# Altium PCB 9-10-00203-3_REV02_062018.PcbDoc
Units mm, origin at the board's own origin, x right, y up, seen from the top; angles counter-clockwise.
Board outline 6.7 x 3.1 mm, 4 copper layers (Layer 1 (Top), Layer 2, Layer 3, Layer 4 (bottom)), stack 0.2 mm thick; 29 components, 23 nets, 104 pads, 28 vias.
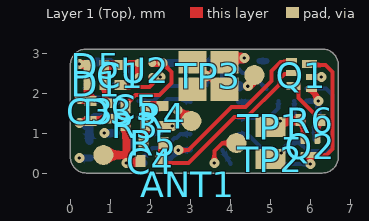
[diagram p0: Layer 1 (Top) view]
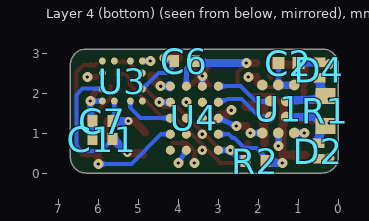
[diagram p1: Layer 4 (bottom) view, seen from below]
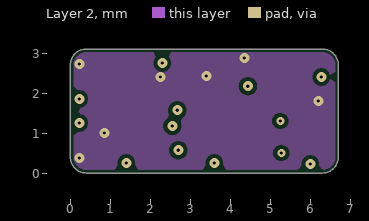
[diagram p2: Layer 2]
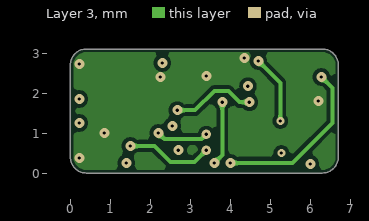
[diagram p3: Layer 3]

## Layer stack, top to bottom
Top Solder: solder mask 0.02, Solder Resist, Dk 0
Layer 1 (Top): signal copper 0.033
Polyimide + Adhesive: dielectric 0.0375, Dk 3.4
Layer 2: signal copper 0.017
Polyimide: dielectric 0.025, Dk 3.4
Layer 3: signal copper 0.017
Polyimide +Adhesive: dielectric 0.0375, Dk 3.4
Layer 4 (bottom): signal copper 0.033
Bottom Solder: solder mask 0.02, Solder Resist, Dk 0

## Board outline
0,0.4 0,2.7 cw(c0.4,2.7) 0.4,3.1 6.3,3.1 cw(c6.3,2.7) 6.7,2.7 6.7,0.4 cw(c6.3,0.4) 6.3,0 0.4,0 cw(c0.4,0.4)

## Design rules (kind name [scope] priority, off if disabled: settings)
AssemblyTestpoint [All] p1 off: testpointundercomponent=TRUE minsize=1.016 maxsize=2.54 preferedsize=1.524 minholesize=0 maxholesize=1.016 preferedholesize=0.813 testpointgrid=0.025 usegrid=TRUE gridtolerance=0 allowsidetop=TRUE allowsidebottom=TRUE
BoardOutlineClearance [All] p1: gap=0.075 ignorepadtopadclearanceinfootprint=FALSE
Clearance [All] p1: gap=0.1 ignorepadtopadclearanceinfootprint=FALSE except(0: Arc-Hole Track-Hole SMDPad-Hole THPad-Hole Via-Hole Fill-Hole Poly-Hole Region-Hole Text-Hole) // Sunstone Circuits Minimum Clearance Rule (Double Sided)
ComponentClearance [All] p1: gap=0 collisioncheckmode=3 verticalgap=0.01 showdistances=FALSE
DiffPairsRouting [All] p1 off: maxlimit=0.254 minlimit=0.254 mostfreqgap=0.254 toplayer_minwidth=0.381 toplayer_maxwidth=0.381 toplayer_prefwidth=0.381 midlayer1_minwidth=0.381 midlayer1_maxwidth=0.381 midlayer1_prefwidth=0.381 midlayer2_minwidth=0.381 midlayer2_maxwidth=0.381 midlayer2_prefwidth=0.381 bottomlayer_minwidth=0.381 bottomlayer_maxwidth=0.381 bottomlayer_prefwidth=0.381 maxuncoupledlength=12.7
FabricationTestpoint [All] p1 off: side=3 testpointundercomponent=TRUE minsize=1.016 maxsize=2.54 preferedsize=1.524 minholesize=0 maxholesize=1.016 preferedholesize=0.813 testpointgrid=0.025 allowsidetop=TRUE allowsidebottom=TRUE usegrid=TRUE gridtolerance=0
HoleSize "HoleSize~Sunstone Circuits" [All] p1: absolutevalues=TRUE maxlimit=2.54 minlimit=0.025 maxpercent=80.000 minpercent=20.000 // SSC Hole Size Rule For Single Sided & Double Sided Designs.
HoleSize Testpoint [All] p2: absolutevalues=TRUE maxlimit=2.54 minlimit=0.025 maxpercent=80.000 minpercent=20.000
HoleSize TestPointUsage [All] p3: absolutevalues=TRUE maxlimit=2.54 minlimit=0.025 maxpercent=80.000 minpercent=20.000
HoleToHoleClearance [All] p1: gap=0.2 allowstackedmicrovias=TRUE
MinimumAnnularRing "MinimumAnnularRing~Sunstone Circuits" [All] p1 off: minimumring=0.125 // Sunstone Circuits Minimum Annular Ring (Double Sided)
MinimumSolderMaskSliver [All] p1: minsoldermaskwidth=0.049
PlaneClearance "PlaneClearance~Sunstone Circuits" [All] p1: clearance=0.1 // Sunstone Circuits Power Plane Clearance Rule (Double Sided)
PlaneConnect "PlaneConnect~Sunstone Circuits" [All] p1: planeconnectstyle=Relief reliefexpansion=0.254 reliefentries=4 reliefconductorwidth=0.203 reliefairgap=0.254 // Sunstone Circuits Power Plane Connect Rule (Double Sided)
PolygonConnect [All vs IsNamedPolygon('Layer 1 (Top)-No Net')] p1: connectstyle=Relief reliefconductorwidth=0.254 reliefentries=4 polygonreliefangle="90 Angle" airgapwidth=0.254
PolygonConnect "PolygonConnect~Sunstone Circuits" [All] p2: connectstyle=Direct reliefconductorwidth=0.203 reliefentries=4 polygonreliefangle="90 Angle" airgapwidth=0.254 // Sunstone Circuits Polygon Connect Style (Double Sided)
RoutingVias "RoutingVias~Sunstone Circuits" [All] p1 off: holewidth=0.254 width=0.635 viastyle="Through Hole" minholewidth=0.152 minwidth=0.381 maxholewidth=0.635 maxwidth=1.016 // Sunstone Circuits Routing Vias Rule (Double Sided)
ShortCircuit "ShortCircuit~Sunstone Circuits" [All] p1: allowed=FALSE // Sunstone Circuits Short Circuit Rule~Do Not Allow (Double Sided)
SilkToSilkClearance [All] p1: silktosilkclearance=0.1
SilkToSolderMaskClearance SilkscreenOverComponentPads [IsPad] p1: minsilkscreentomaskgap=0.064 clearancetoexposedcopper=TRUE
SolderMaskExpansion "SolderMaskExpansion~Sunstone Circuits" [All] p1: expansion=0.07 // Sunstone Circuits Solder Mask Expansion Rule (Double Sided)
ViasUnderSMD "ViasUnderSMD~Sunstone Circuits" [All] p1: allowed=TRUE // Sunstone Circuits Vias Under SMD~Do Not Allow (Double Sided)
Width "Width~Sunstone Circuits" [All] p1 off: maxlimit=2.54 minlimit=0.076 preferedwidth=0.254 toplayer_prefwidth=0.076 midlayer1_minwidth=0.152 midlayer2_minwidth=0.152 bottomlayer_prefwidth=0.102 minimp=50.000000 maximp=50.000000 favimp=50.000000 // Sunstone Circuits Minimum Width Rule (Double Sided)
18 further rules are at their usual default settings.

## Classes and differential pairs
component class ZPW_Z601Rx_Sheet2_030218: C4 C5 C6 C7 C8 C9 C10 C11 Q1 Q2 R2 R3 R4 R5 R6 TP1 TP2 TP3 U3 U4
component class ZPW_Z601Rx_Sheet1_030218: ANT1 C1 C2 C3 D1 D2 D3 D4 D5 R1 U1 U2

## Components (designator, comment, footprint, x,y, rotation, side; value= is the part's Value field where it differs from the comment)
ANT1 "=Value" "NFC ANTENNA MOUNT - SMALL" 2.941,-0.292 r270 top
C1 "2.2uF" CAPC0603X03L(0201)#1 1.25,2.45 r90 top
C2 "2.2uF" CAPC0603X03L(0201)#2 1.25,2.75 r0 bottom
C3 "220pF" CAPC0603X03L(0201)#1 0.5,1.55 r270 top
C4 "47nF" CAPC0603X03L(0201)#1 2,0.3 r180 top
C5 "470nF" CAPC0603X03L(0201)#1 1.625,1.65 r0 top
C6 "2.2uF" CAPC0603X03L(0201)#3 3.85,2.8 r180 bottom
C7 "2.2uF" CAPC0603X03L(0201)#1 5.9,1.3 r180 bottom
C11 "2.2uF" CAPC0603X03L(0201)#1 5.9,0.85 r180 bottom
D1 "497-15253-1-ND" BAT30F4 0.65,2.225 r180 top
D2 "497-15253-1-ND" BAT30F4 0.5,0.55 r270 bottom
D3 "497-15253-1-ND" BAT30F4 0.95,1.55 r270 top
D4 "497-15253-1-ND" BAT30F4 0.475,2.575 r90 bottom
D5 "GDZ4V7LP3-7DICT-ND" DFN35P61X30-2N 0.65,2.675 r180 top
Q1 "DMC21D1UDA" DMC21D1UDA 5.775,2.45 r90 top
Q2 "CSD23280F3" CSD23280F3 6,0.675 r270 top
R1 "5.1k" "RES1005X06L (0402 Imperial)" 0.325,1.55 r270 bottom
R2 "100" RES0603X03L(0201) 2.075,0.3 r0 bottom
R3 "69.8K" RES0603X03L(0201) 1.625,1.2 r180 top
R4 "24.3K" RES0603X03L(0201) 2.3,1.425 r270 top
R5 "243K" RES0603X03L(0201) 2.075,0.75 r180 top
R6 "220K" RES0603X03L(0201) 6,1.325 r0 top
TP1 "BAT+" "PAD 1.5MM X 0.5MM"#1 5.075,1.15 r0 top locked
TP2 "Vout" "PAD 1.5MM X 0.5MM"#2 5,0.35 r0 top locked
TP3 "BAT-" BAT- 3.45,2.43 r0 top locked
U1 "AS3953B-BTWM NFX Rx IC" 10-WLCSP 1.5,1.6 r90 bottom
U2 "2.5V LDO 450mA non-active" BGA4x2 1.875,2.575 r0 top locked
U3 "ZPA125CSP" BGA12C30P4X4_138X138X38 5.4,2.3 r90 bottom
U4 "MKL03Z32CAF4R" MKL03Z32CBF4R 3.6,1.37 r90 bottom value=Value

## Footprints (in the part's own frame and the unit in brackets; to place one, negate y for a bottom-side part, rotate by r counter-clockwise, add the part's x,y. Pads: shape width x height; smd on the part's side, far side on the other; paste and mask are expansions set on the pad)
10-WLCSP [mm] "AS3953A WLCSP"
  round 0.27 smd paste+0 mask+0.05: A1(-0.6,0.4) A2(-0.2,0.2) A3(0.2,0.2) A4(0.6,0.4) B1(-0.6,0) B2(-0.2,-0.2) B3(0.2,-0.2) B4(0.6,0) C1(-0.6,-0.4) C4(0.6,-0.4)
BAT30F4 [mm]
  rect 0.24x0.3 smd mask+0.05: 1(-0.195,0) 2(0.195,0)
  body extent -0.3,-0.15 0.3,0.15, height 0.3
BAT- [mm] "bat- placeholder"
  rect 0.7x0.57 smd paste-0.35 mask+0.05: 1(-0.4,0.337) 1(0.4,0.337)
  rect 0.7x0.58 smd paste-0.35 mask+0.05: 1(-0.4,-0.337) 1(0.4,-0.337)
  Layer 1 (Top) lines w0.125: -0.245,0.249 -0.021,0.024 0,0.003 ; -0.235,-0.232 -0.029,-0.026 0,0.003 ; 0.235,-0.231 0,0.003 ; 0.236,0.239 0,0.003
  body extent -0.75,-0.63 0.75,0.89, height 4.23
BGA4x2 [mm]
  round 0.2 smd mask+0.075: A1(-0.175,0.175) A2(0.175,0.175) B1(-0.175,-0.175) B2(0.175,-0.175)
  body extent -0.32,-0.32 0.32,0.32, height 0.4
BGA12C30P4X4_138X138X38 [mm] "BGA, 12-Leads, Body 1.4x1.4mm,  Pitch 0.30mm"
  round 0.175 smd mask+0.05: 1(-0.5,0.5) 2(-0.2,0.5) 3(0.2,0.5) 4(0.5,0.5) 5(0.5,0.2) 6(0.5,-0.2) 7(0.5,-0.5) 8(0.2,-0.5) 9(-0.2,-0.5) 10(-0.5,-0.5) 11(-0.5,-0.2) 12(-0.5,0.2)
  body extent -0.7,-0.69 0.69,0.7, height 0.36
CAPC0603X03L(0201)#1 [mm]
  rect 0.25x0.3 smd mask+0.05: 1(-0.25,0) 2(0.25,0)
  body extent -0.3,-0.15 0.3,0.15, height 0.33
CAPC0603X03L(0201)#2 [mm]
  rect 0.3x0.3 smd mask+0.05: 1(-0.25,0) 2(0.25,0)
  body extent -0.3,-0.15 0.3,0.15, height 0.33
CAPC0603X03L(0201)#3 [mm]
  rect 0.24x0.3 smd mask+0.075: 1(-0.25,0)
  rect 0.25x0.3 smd mask+0.075: 2(0.25,0)
  body extent -0.3,-0.15 0.3,0.15, height 0.33
CSD23280F3 [mm] "-12V P-CHANNEL FEMNTOFET"
  rrect50% 0.25x0.15 smd mask+0.05: 1(-0.175,0.175) 2(-0.175,-0.175)
  rrect50% 0.15x0.5 smd mask+0.05: 3(0.225,0)
  round 0.1 on Mech2: 5(-0.203,0.175)
  body extent -0.36,-0.32 0.37,0.32, height 0.35
DFN35P61X30-2N [mm] "DFN, 2-Leads, Body 0.31x0.61mm, Pitch 0.35mm, IPC Medium Density"
  rect 0.24x0.3 smd mask+0.05: 1(-0.195,0) 2(0.195,0)
  body extent -0.31,-0.16 0.31,0.16, height 0.3
DMC21D1UDA [mm] "-12V P-Channel FemntoFET MOSFET"
  rect 0.2x0.35 smd mask+0.075: D1(-0.275,0.2)
  rect 0.2x0.375 smd mask+0.075: D2(0.275,-0.2)
  rect 0.15x0.275 smd mask+0.075: G1(-0.05,-0.25) G2(0.05,0.243) S1(-0.35,-0.25) S2(0.35,0.243)
MKL03Z32CBF4R [mm] "MKl03 CSp package"
  round 0.23 smd mask+0.05: A1(-0.8,0.6) A2(-0.4,0.6) A3(0,0.6) A4(0.4,0.6) A5(0.8,0.6) B1(-0.8,0.2) B2(-0.4,0.2) B3(0,0.2) B4(0.4,0.2) B5(0.8,0.2) C1(-0.8,-0.2) C2(-0.4,-0.2) C3(0,-0.2) C4(0.4,-0.2) C5(0.8,-0.2) D1(-0.8,-0.6) D2(-0.4,-0.6) D3(0,-0.6) D4(0.4,-0.6) D5(0.8,-0.6)
  body extent -1,-0.8 1,0.8, height 0.34
"NFC ANTENNA MOUNT - SMALL" [mm] "Small NFC Antenna Mount"
"PAD 1.5MM X 0.5MM"#1 [mm]
  rect 0.75x0.5 smd paste-0.75 mask+0.075: 1(-0.075,0)
"PAD 1.5MM X 0.5MM"#2 [mm]
  rect 0.75x0.5 smd paste-0.75 mask+0.075: 1(0,0)
RES0603X03L(0201) [mm]
  rect 0.25x0.3 smd mask+0.05: 1(-0.25,0) 2(0.25,0)
  body extent -0.3,-0.15 0.3,0.15, height 0.33
"RES1005X06L (0402 Imperial)" [mm] "Chip Resistor 2-Leads, Body 1.00x0.50mm, IPC High Density"
  rect 0.4x0.5 smd mask+0.05: 1(-0.375,0) 2(0.375,0)
  body extent -0.52,-0.28 0.53,0.27, height 0.55

## Part data
ANT1: library part NFC_Antenna, "NFC Antenna"
C1 C2 C6 C7 C11: library part "Cap Semi", "CAP CER 2.2UF 6.3V X5R 0201", Manufacturer=Murata, Manufacturer Part Number=GRM033R60J225ME47D, Package=0201, Supplier1 Part Number=490-13225-2-ND, Tolerance=20%, Voltage Rating=6.3V, CM BOM=X, LatestRevisionDate=29-May-2009, LatestRevisionNote="IPC-7351 Footprint Added.", PackageDescription="Chip Capacitor, 0603", Published=8-Jun-2000, Publisher="Altium Limited", Supplier1=Digi-Key, Type=CAP
C3: library part Cap, "Capacitor", Manufacturer=Murata, Manufacturer Part Number=GRM0335C1H221JA01D, Operating Temperature="-55°C ~ 125°C", Package / Case="0201 (0603 Metric)", Ratings=-, Standard Package=15,000, Supplier Part Number 1=490-11316-2-ND, Temperature Coefficient="C0G, NP0", Tolerance=±5%, Voltage - Rated=50V, Applications="General Purpose", Capacitance=220pF, Catalog Drawings="GRM Series_0201", Category=Capacitors, ComponentLink1Description=http://components.arrow.com/part/dataview/0323_06471816, ComponentLink1URL=http://components.arrow.com/part/dataview/0323_06471816, ComponentLink2Description=http://search.murata.co.jp/Ceramy/image/img/A01X/partnumbering_e_01.pdf, ComponentLink2URL=http://search.murata.co.jp/Ceramy/image/img/A01X/partnumbering_e_01.pdf, ComponentLink3Description=http://psearch.murata.com/capacitor/product/GRM0335C1H390JA01%23.pdf, ComponentLink3URL=http://psearch.murata.com/capacitor/product/GRM0335C1H390JA01%23.pdf, ComponentLink4Description=http://psearch.en.murata.com/capacitor/product/GRM0335C1H390JA01%23.pdf, ComponentLink4URL=http://psearch.en.murata.com/capacitor/product/GRM0335C1H390JA01%23.pdf, Family="Ceramic Capacitors", Mounting Type="Surface Mount, MLCC", Packaging="Tape & Reel (TR)", Pricing 1="1=0.1, 10=0.01, 100=0.0037, 500=0.0027, 1000=0.0021, 2500=0.0019, 5000=0.0018 (USD)", Series=GRM, Size / Dimension="0.024\" L x 0.012\" W (0.60mm x 0.30mm)", Supplier 1=Digikey, Thickness (Max)="0.013\" (0.33mm)"
C4: library part "Cap Semi", "CAP CER 0.047UF 16V X5R 0201", Manufacturer Part Number=GRM033R61C473KE84D, Package=0201, Supplier1 Part Number=490-7227-2-ND, Tolerance=20%, Voltage Rating=16V, CM BOM=X, LatestRevisionDate=29-May-2009, LatestRevisionNote="IPC-7351 Footprint Added.", PackageDescription="Chip Capacitor", PackageReference=0201, Published=8-Jun-2000, Publisher="Altium Limited", Supplier1=DigiKey, Type=CAP
C5: library part "Cap Semi", "CAP CER 0.47UF 4V X5R 0201", Manufacturer Part Number=GRM033R60G474ME90D, Package=0201, Supplier1 Part Number=490-10405-2-ND, Tolerance=20%, Voltage Rating=4V, CM BOM=X, LatestRevisionDate=29-May-2009, LatestRevisionNote="IPC-7351 Footprint Added.", PackageDescription="Chip Capacitor", Published=8-Jun-2000, Publisher="Altium Limited", Supplier1=DigiKey, Type=CAP
D1 D2 D3 D4: library part BAT30F4, "DIODE SCHOTTKY", Capacitance @ Vr, F=-, Current - Average Rectified (Io)=300mA, Current - Reverse Leakage @ Vr="50µA @ 30V", Manufacturer=STMicroelectronics, Operating Temperature - Junction="-30°C ~ 85°C", Package / Case=2-XFDFN, Supplier Device Package=0201, Voltage - DC Reverse (Vr) (Max)=30V, Voltage - Forward (Vf) (Max) @ If="310mV @ 10mA", Category="Discrete Semiconductor Products", ComponentLink1Description=http://www.farnell.com/datasheets/1880978.pdf, ComponentLink1URL=http://www.farnell.com/datasheets/1880978.pdf, ComponentLink2Description=http://www.farnell.com/datasheets/1865111.pdf, ComponentLink2URL=http://www.farnell.com/datasheets/1865111.pdf, ComponentLink3Description=http://www.st.com/st-web-ui/st@ic/active/en/resource/technical/document/datasheet/DM00104747.pdf, ComponentLink3URL=http://www.st.com/st-web-ui/st@ic/active/en/resource/technical/document/datasheet/DM00104747.pdf, ComponentLink4Description=http://www.st.com/st-web-ui/static/active/en/resource/technical/document/datasheet/DM00104747.pdf, ComponentLink4URL=http://www.st.com/st-web-ui/static/active/en/resource/technical/document/datasheet/DM00104747.pdf, Diode Type=Schottky, Family="Diodes - Rectifiers - Single", Manufacturer Part Number=BAT30F4, Mounting Type="Surface Mount", Packaging="Tape &amp; Reel (TR)", Pricing 1="1=0.4, 10=0.326, 100=0.1726, 500=0.1136, 1000=0.0772 (USD)", Reverse Recovery Time (trr)=-, Series=-, Speed="Fast Recovery =  200mA (Io)", Stock 1=40093, Supplier 1=Digikey, Supplier Part Number 1=497-15253-1-ND
D5: library part GDZ4V7LP3-7, "DIODE ZENER 4.7V 250MW 2DFN", Current - Reverse Leakage @ Vr="2µA @ 1V", Manufacturer=Diodes, Operating Temperature="-55°C ~ 150°C (TA)", Package / Case=2-XFDFN, Power - Max=250mW, Supplier Device Package=2-X3-DFN0603, Tolerance=-, Voltage - Zener (Nom) (Vz)=4.7V, Category="Discrete Semiconductor Products", ComponentLink1Description=https://datasheet.ciiva.com/29597/gdzxvxlp3-29597945.pdf, ComponentLink1URL=https://datasheet.ciiva.com/29597/gdzxvxlp3-29597945.pdf, ComponentLink2Description=https://datasheet.ciiva.com/29597/gdzxvxlp3-29597946.pdf, ComponentLink2URL=https://datasheet.ciiva.com/29597/gdzxvxlp3-29597946.pdf, ComponentLink3Description=https://datasheet.ciiva.com/29597/gdzxvxlp3-29597947.pdf, ComponentLink3URL=https://datasheet.ciiva.com/29597/gdzxvxlp3-29597947.pdf, Family="Diodes - Zener - Single", Impedance (Max) (Zzt)=-, Manufacturer Part Number=GDZ4V7LP3-7, Mounting Type="Surface Mount", Packaging="Tape & Reel (TR)", Pricing 1="1=0.37, 10=0.304, 100=0.1615, 500=0.1062, 1000=0.0722 (USD)", Proven=False, Series="Automotive, AEC-Q101", Stock 1=5000, Supplier 1=Digikey, Supplier Part Number 1=GDZ4V7LP3-7DICT-ND, Voltage - Forward (Vf) (Max) @ If=-
Q1: "COMPLEMENTARY PAIR ENHANCEMENT MODE MOSFET", Manufacturer Part Number=DMC21D1UDA
Q2: library part DMP2160UW, "MOSFET P-CH -12V", CM BOM=X, Manufacturer Part Number=CSD23280F3, Supplier1=Digi-Key, Type=MOSFET
R1: library part Resistor, "RES SMD 5.1KOHM 0.25% 1/16W 0402", Manufacturer=Panasonic, Manufacturer Part Number=ERA-2ARC512X, Package / Case=0402, Power (Watts)="0.063W, 1/16W", Supplier1 Part Number=P5.1KCQCT-ND, Tolerance=±0.25%, Category=Resistors, Family="Chip Resistor - Surface Mount", Number of Terminations=2, Resistance (Ohms)=5.1k, Supplier1=Digikey, Supplier Device Package=0402
R2: library part Res3, "RES SMD 100 OHM 0.1% 1/20W 0201", Manufacturer Part Number=ERA-1AEB101C, Package=0201, Power Rating=1/20W, Supplier1 Part Number=P100BXTR-ND, Tolerance=0.1%, CM BOM=X, LatestRevisionDate=29-May-2009, LatestRevisionNote="IPC-7351 Footprint Added.", PackageDescription="Chip Resistor", Published=8-Jun-2000, Publisher="Altium Limited", Supplier1=Digi-Key, Type=RES
R3: library part Res3, "RES SMD 69.8K OHM 1% 1/20W 0201", Manufacturer Part Number=RC0201FR-0769K8L, Package=0201, Power Rating=1/10W, Supplier1 Part Number=YAG2776TR-ND, Tolerance=1%, CM BOM=X, LatestRevisionDate=29-May-2009, LatestRevisionNote="IPC-7351 Footprint Added.", PackageDescription="Chip Resistor", Published=8-Jun-2000, Publisher="Altium Limited", Supplier1=DigiKey, Type=RES
R4: library part Res3, "RES SMD 24.3K OHM 1% 1/20W 0201", Manufacturer Part Number=ERJ-1GEF2432C, Package=0201, Power Rating=1/20W, Supplier1 Part Number=P24.3KABTR-ND, Tolerance=1%, CM BOM=X, LatestRevisionDate=29-May-2009, LatestRevisionNote="IPC-7351 Footprint Added.", PackageDescription="Chip Resistor", Published=8-Jun-2000, Publisher="Altium Limited", Supplier1=DigiKey, Type=RES
R5: library part Res3, "RES SMD 243K OHM 1% 1/20W 0201", Manufacturer Part Number=RMCF0201FT243K, Package=0201, Power Rating=1/20W, Supplier1 Part Number=RMCF0201FT243KTR-ND, Tolerance=1%, CM BOM=X, LatestRevisionDate=29-May-2009, LatestRevisionNote="IPC-7351 Footprint Added.", PackageDescription="Chip Resistor", Published=8-Jun-2000, Publisher="Altium Limited", Supplier1=DigiKey, Type=RES
R6: library part Res3, "RES SMD 220K OHM 1% 1/20W 0201", Manufacturer Part Number=RC0201FR-07220KL, Package=0201, Power Rating=1/20W, Supplier1 Part Number=YAG2277CT-ND, Tolerance=1%, CM BOM=X, LatestRevisionDate=29-May-2009, LatestRevisionNote="IPC-7351 Footprint Added.", PackageDescription="Chip Resistor", Published=8-Jun-2000, Publisher="Altium Limited", Supplier1=DigiKey, Type=RES
TP2 TP3: library part BAT+, "BAT+"
U1: library part AS3953A_WLCSP, "IC NFC INTERFACE 14443A LEVEL4", Frequency="13.56 MHz", Manufacturer="austriamicrosystems (ams)", Manufacturer Part Number=AS3953B-BTWM, Maximum Operating Temperature="+ 85 C", Minimum Operating Temperature="- 40 C", Operating Temperature Range="- 40 C to + 85 C", Package / Case=WLCSP-10, Supplier Part Number 1=AS3953B-BTWMCT-ND, Brand=ams, ComponentLink1Description=http://www.mouser.com/ds/2/588/AS3953A_Datasheet_EN_v1-253125.pdf, ComponentLink1URL=http://www.mouser.com/ds/2/588/AS3953A_Datasheet_EN_v1-253125.pdf, ComponentLink2Description=http://www.ams.com/eng/content/download/325044/1140864/78495, ComponentLink2URL=http://www.ams.com/eng/content/download/325044/1140864/78495, Factory Pack Quantity=12000, Function="Designed to create a fast data link between an ISO 14443A reader device (PCD) and a microcontroller", Memory Size="1 kbit", Mounting Style=SMD/SMT, Packaging=Reel, Pricing 1="12000=0.4121 (USD)", Product Category="RFID Transponders", RoHS=Details, Series=AS3953, Stock 1=0, Supplier 1=Digikey
U2: library part NCP161BFCT250T2G, "LDO Voltage Regulators CSP LDO 450MA NON-ACTIVE", Current - Limit (Min)=-, Current - Output=200mA, Manufacturer=OnSemi, Manufacturer Part Number=LDBL20D-25R, Operating Temperature="-40°C ~ 125°C", Package / Case=4-STSTAMP™, Supplier Part Number 1=NCP161BFCT250T2G-ND, Voltage - Input="Up to 5.5V", Voltage - Output=2.5V, Category="Integrated Circuits (ICs)", Family="PMIC - Voltage Regulators - Linear", Mounting Type="Surface Mount", Number of Regulators=1, Packaging="Tape & Reel (TR)", Regulator Topology="Positive Fixed", Series=-, Supplier 1=Digi-Key, Supplier Device Package=4-STSTAMP™, Voltage - Dropout (Typical)=-
U3: Supplier1 Part Number="ZPA125 R2", CM BOM=X, Supplier1=ZPower
U4: library part MKL03Z32CBF4R_1, "Kinetis Kl03: 48MHz Cortex-M0+ Ultra low power MCU", Manufacturer Part Number=MKL03Z32CBF4R, Supplier1 Part Number=MKL03Z32CBF4R-ND, CM BOM=X, Supplier1=Digi-Key, Vendor=FREESCALE

## Free pads (board coordinates)
  round 0.5 smd paste+0 mask+0.05: 4(0.825,0.45) 4(3.025,1.3) 4(4.15,0.75) 4(4.6,2.45)

## Via types
v1: diameter 0.25, hole 0.085, Layer 1 (Top) to Layer 4 (bottom), tented both sides, 15 vias
v2: diameter 0.25, hole 0.085, Layer 3 to Layer 4 (bottom), tented bottom, 5 vias
v3: diameter 0.2, hole 0.085, Layer 1 (Top) to Layer 4 (bottom), tented bottom, 2 vias
v4: diameter 0.23, hole 0.085, Layer 3 to Layer 4 (bottom), 2 vias
v5: diameter 0.25, hole 0.085, Layer 1 (Top) to Layer 4 (bottom), tented top, 2 vias
v6: diameter 0.25, hole 0.085, Layer 3 to Layer 4 (bottom), 1 vias
v7: diameter 0.25, hole 0.085, Layer 1 (Top) to Layer 4 (bottom), tented bottom, 1 vias

## Nets (pads, with @x,y where several pads share a name; then routed paths per layer and width w, separated by ;. In a path a pad name is that pad's centre, name@x,y a point inside that pad or via, vN(x,y) a via of type N, cw(c..) or ccw(c..) an arc to the next point about the centre after c; other vN are vias at no path point)
BAT+: C7.2 Q2.2 R6.1 TP1.1 U3.7 U3.12 | length 4.3
  Layer 1 (Top) w0.1: Q2.2@5.802,0.873 5.815,0.86 Q2.2
  Layer 1 (Top) w0.12: Q2.2@5.815,0.85 5.815,0.86 R6.1@5.815,1.325
  Layer 1 (Top) w0.2: TP1.1@4.828,1.017 TP1.1@5.104,1.293 ; TP1.1@5.1,1.3 v3(5.25,1.3) R6.1@5.75,1.3
  Layer 3 w0.1: v2(4.7,2.8) 5.25,2.25 v3(5.25,1.3)
  Layer 4 (bottom) w0.1: v2@4.702,2.815 v2@4.725,2.815 ; U3.12@5.593,1.807 U3.12 C7.2@5.6,1.35
  Layer 4 (bottom) w0.15: v2@4.725,2.8 U3.7
  Layer 4 (bottom) w0.2: v3(5.25,1.3) C7.2
GND: C1.1 C2.1 C6.1 C7.1 C11.1 D2.2 D4.2 D5.2 Q1.S1 TP3.1 U1.C1 U2.B2 U3.1 U3.9 U4.C5 | length 5.9
  Layer 1 (Top) w0.1: C1.1@1.25,2.15 1.975,2.15 2.05,2.225 U2.B2
  Layer 1 (Top) w0.15: Q1.S1@6.05,2.1 v1(6.2,1.8)
  Layer 1 (Top) w0.2: U2.B2 v1(2.25,2.4) ; TP3.1@4.012,2.876 TP3.1@4.013,2.875
  Layer 1 (Top) w0.22: v1@0.225,2.715 D5.2@0.425,2.715
  Layer 1 (Top) w0.25: TP3.1@4.013,2.875 v1(4.35,2.875)
  Layer 4 (bottom) w0.1: U4.C5@3.4,2.186 v7(3.4,2.425) ; C6.1@4.1,2.7 4.3,2.5 4.5,2.5 U3.9 ; C7.1@6.155,1.289 C7.1@6.168,1.302
  Layer 4 (bottom) w0.125: U3.1 v1(6.2,1.8)
  Layer 4 (bottom) w0.15: C7.1@6.2,1.281 v1(6.2,1.8)
  Layer 4 (bottom) w0.175: v1(0.225,0.375) D2.2@0.5,0.375
  Layer 4 (bottom) w0.2: D4.2@0.475,2.775 C2.1@1,2.775 ; v1(0.85,1) U1.C1 U1.C1@1.127,1 ; C6.1@4.1,2.85 v1@4.35,2.85 ; v1@4.351,2.872 v1(4.35,2.875) ; C11.1 C7.1@6.15,1.25
  other v1: 0.225,2.725
GPIO: Q1.G1 U4.B1 | length 4.9
  Layer 1 (Top) w0.1: Q1.G1@6.04,2.394 Q1.G1@6.046,2.4
  Layer 1 (Top) w0.15: Q1.G1@6.046,2.4 v1(6.275,2.4)
  Layer 3 w0.1: v2(4,0.25) 5.55,0.25 6.55,1.25 6.55,2.125 v1(6.275,2.4)
  Layer 4 (bottom) w0.1: U4.B1 v2(4,0.25) ; v2@3.994,0.246 v2@4.005,0.228
MISO: U1.A3 U4.D5 | length 1.5
  Layer 4 (bottom) w0.1: U1.A3 2.075,1.8 2.445,2.17 U4.D5
MOSI: U1.A2 U4.D4 | length 1.5
  Layer 4 (bottom) w0.1: U1.A2 1.975,1.4 2.425,1.85 2.75,1.85 U4.D4
NetC4_1: C4.1 Q1.G2 R5.1 | length 4.8
  Layer 1 (Top) w0.1: C4.1@2.25,0.25 2.95,0.25 4.1,1.4 4.41,1.4 5.225,2.215 5.225,2.35 5.35,2.475 5.536,2.475 Q1.G2@5.54,2.48 ; C4.1@2.25,0.256 C4.1@2.25,0.275 ; C4.1@2.266,0.215 C4.1@2.275,0.205
  Layer 1 (Top) w0.15: C4.1@2.275,0.3 R5.1@2.275,0.75
NetC5_2: C5.2 R3.1 R4.1 R5.2 | length 1.3
  Layer 1 (Top) w0.2: R5.2@1.85,0.75 R3.1@1.85,1.15
  Layer 1 (Top) w0.25: R3.1@1.875,1.221 C5.2 ; C5.2@1.875,1.675 R4.1
NetQ1_D1: Q1.D1 Q2.1 R6.2 | length 1.6
  Layer 1 (Top) w0.1: Q1.D1@5.7,2.175 5.7,1.875 R6.2@6.2,1.375 ; R6.2@6.191,1.4 6.202,1.4 R6.2@6.202,1.364 ; R6.2@6.202,1.349 R6.2@6.202,1.364 ; R6.2@6.276,1.332 6.234,1.332 R6.2@6.202,1.364
  Layer 1 (Top) w0.12: Q2.1@6.185,0.9 R6.2@6.185,1.3
OUT_A: Q1.D2 Q2.3 U4.A2 | length 5.4
  Layer 1 (Top) w0.1: Q2.3 6.4,0.45 6.55,0.6 6.55,2.525 6.375,2.7 Q1.D2@6.1,2.7 ; Q1.D2@6.05,2.732 Q1.D2@6.105,2.677
  Layer 1 (Top) w0.15: v1(6,0.225) Q2.3
  Layer 4 (bottom) w0.1: U4.A2 4.43,0.97 5.175,0.225 ; 5.2,0.225 5.354,0.225 ; 5.354,0.225 v1@5.97,0.225
PWM: R4.2 U4.D3 | length 0.7
  Layer 1 (Top) w0.2: R4.2 v1(2.55,1.175)
  Layer 4 (bottom) w0.125: v1(2.55,1.175) U4.D3
R_SNS-: Q1.S2 R2.2 U4.D1 | length 4.6
  Layer 1 (Top) w0.1: v1(2.7,0.57) 2.95,0.57 4.03,1.65 4.375,1.65 5.025,2.3 5.025,2.55 5.25,2.775 Q1.S2@5.5,2.775
  Layer 4 (bottom) w0.1: U4.D1@2.947,0.568 U4.D1@2.968,0.568
  Layer 4 (bottom) w0.125: v1@2.7,0.564 v1(2.7,0.57) U4.D1
  Layer 4 (bottom) w0.15: R2.2@2.325,0.375 2.505,0.375 v1(2.7,0.57)
RESET_B: pad.4@4.15,0.75 U4.B4 | length 2.5
  Layer 1 (Top) w0.1: v1(3.6,0.25) 3.6,0.55 3.601,0.551 3.8,0.75 pad.4@4.15,0.75
  Layer 3 w0.1: v1(3.6,0.25) 3.8,0.45 v6(3.8,1.77)
SCLK: U1.B1 U4.C1 | length 2.5
  Layer 3 w0.1: v2(1.5,0.675) 2.1,0.675 2.5,0.275 3.1,0.275 v4(3.4,0.57)
  Layer 4 (bottom) w0.125: v2(1.5,0.675) U1.B1
SS*: U1.A1 U4.C2 | length 1.7
  Layer 3 w0.1: v2(2.2,1) 2.35,0.85 3.28,0.85 v4(3.4,0.97)
  Layer 4 (bottom) w0.1: U1.A1@1.901,0.994 U1.A1@1.928,0.999 ; v2@2.191,1.049 v2@2.2,1.051
  Layer 4 (bottom) w0.125: U1.A1 v2(2.2,1) v2@2.25,1
SWD_CLK: pad.4@3.025,1.3 U4.A4 | length 3
  Layer 1 (Top) w0.1: v1(2.675,1.57) v1@2.678,1.567 ; pad.4@3.195,1.295 pad.4@3.203,1.286
  Layer 1 (Top) w0.125: pad.4@3.042,1.381 3.062,1.371 3.121,1.341 pad.4@3.2,1.3
  Layer 1 (Top) w0.2: v1(2.675,1.57) pad.4@3.025,1.3
  Layer 3 w0.1: v1(2.675,1.57) 3.12,1.57 3.6,2.05 3.95,2.05 4.23,1.77 v2(4.475,1.77)
  Layer 4 (bottom) w0.125: U4.A4 v2(4.475,1.77) v2@4.483,1.77
SWD_DIO: pad.4@4.6,2.45 U4.A5 | length 0.6
  Layer 1 (Top) w0.25: v1(4.44,2.17) 4.664,2.394 pad.4@4.664,2.418
  Layer 4 (bottom) w0.125: U4.A5@4.215,2.17 v1(4.44,2.17)
  Layer 4 (bottom) w0.25: U4.A5@4.214,2.168 U4.A5@4.215,2.17
V+: C3.1 D1.2 D4.1 R1.1 U1.B3 | length 2.1
  Layer 1 (Top) w0.2: C3.1@0.45,1.8 0.45,1.85 D1.2@0.45,2.275
  Layer 1 (Top) w0.25: v5(0.225,1.85) C3.1@0.45,1.85
  Layer 4 (bottom) w0.2: R1.1@0.325,1.825 R1.1@0.45,1.825 ; D4.1@0.45,2.291 R1.1@0.45,1.825 ; U1.B3@1.3,1.825 R1.1@0.45,1.825
V-: C3.2 D2.1 D3.2 R1.2 U1.B2 | length 2.1
  Layer 1 (Top) w0.175: C3.2@0.5,1.325 0.925,1.325 D3.2@0.95,1.325
  Layer 1 (Top) w0.2: v5@0.225,1.275 C3.2@0.5,1.275
  Layer 4 (bottom) w0.2: R1.2@0.375,1.175 0.6,1.4 U1.B2 ; D2.1@0.475,0.8 R1.2@0.475,1.175
  other v5: 0.225,1.25
V_SENSE: U3.11 U4.A3 | length 1.3
  Layer 4 (bottom) w0.1: U4.A3 4.95,1.37 5.2,1.62 U3.11
Vbridge: C1.2 D1.1 D3.1 D5.1 U2.A1 U2.B1 | length 2
  Layer 1 (Top) w0.1: D1.1@0.791,2.261 0.791,2.222 D1.1@0.866,2.147
  Layer 1 (Top) w0.125: D3.1@0.866,1.841 D1.1@0.866,2.147
  Layer 1 (Top) w0.15: C1.2@1.277,2.75 U2.A1 U2.B1
  Layer 1 (Top) w0.2: D1.1@0.85,2.275 0.85,2.7 C1.2@1.225,2.7
VDD: C4.2 C5.1 C6.2 pad.4@0.825,0.45 R2.1 R3.2 U2.A2 U4.B5 U4.D2 | length 8.4
  Layer 1 (Top) w0.1: C5.1@1.4,1.725 1.625,1.95 2.225,1.95 2.525,2.25 2.525,2.525 v1(2.3,2.75)
  Layer 1 (Top) w0.2: pad.4@0.825,0.45 1.4,0.45 R3.2@1.4,1.2 ; R3.2 C5.1 ; 1.4,0.449 v1(1.4,0.25) C4.2@1.75,0.25 ; U2.A2 v1@2.275,2.75
  Layer 4 (bottom) w0.1: R2.1@1.8,0.37 2.05,0.62 2.35,0.62 2.6,0.87 2.65,0.87 2.75,0.97 U4.D2 U4.D2@2.997,0.967
  Layer 4 (bottom) w0.125: C6.2 3.8,2.6 U4.B5
  Layer 4 (bottom) w0.2: v1(1.4,0.25) R2.1@1.825,0.25 ; v1(2.3,2.75) C6.2@3.607,2.75
Vout: C11.2 TP2.1 U3.2 | length 3.9
  Layer 1 (Top) w0.2: TP2.1@4.882,0.449 4.934,0.5 5.25,0.5 TP2.1@5.264,0.5
  Layer 4 (bottom) w0.1: C11.2@5.705,0.78 5.935,0.55 6.418,0.55 6.55,0.682 6.55,1.956 6.394,2.113 5.906,2.113 U3.2@5.9,2.118
  Layer 4 (bottom) w0.2: v3(5.275,0.5) C11.2@5.625,0.85
VP_Reg: C2.2 U1.B4 U1.C4 | length 1
  Layer 4 (bottom) w0.1: U1.B4 C2.2
  Layer 4 (bottom) w0.15: U1.C4 U1.B4
pads on no net: Q2.5 U1.A4 U3.3 U3.4 U3.5 U3.6 U3.8 U3.10 U4.A1 U4.B2 U4.B3 U4.C3 U4.C4

## Polygon pours and split planes (outlines as drawn)
GND on Layer 2 "Layer 2 - GND" (solid, pour order 2): -1.071,3.274 -1.101,3.243 -1.101,-0.559 6.864,-0.559 6.864,3.421
GND on Layer 3 "Layer3 - GND" (solid, pour order 4): -1.224,3.281 -1.224,-0.712 -1.14,-0.796 6.867,-0.796 6.867,3.287

## Other copper
Layer 1 (Top):
  text "Top Layer       *.GTL" at 90.505,-7.15 h1.52
Layer 2:
  text "Layer 2         *.G1" at 90.65,-10.416 h1.52
Layer 3:
  text "Layer 3         *.G2" at 90.65,-13.609 h1.52
Layer 4 (bottom):
  text "Bottom Layer     *.GBL" at 89.923,-17.106 h1.52

## Silkscreen, mask and mechanical layers (free items; w line width, h text height)
Top Paste:
  text "Top Paste       *.GTP" at 90.287,-1.053 h1.52
Bottom Paste:
  text "Bottom Paste     *.GBP" at 90.109,-23.321 h1.52
Top Solder:
  text "Top Solder      *.GTS" at 90.505,-4.247 h1.52
Bottom Solder:
  text "Bottom Solder    *.GBS" at 90.029,-20.107 h1.52
PWB Outline:
  the board outline again, w0.05
Artwork Graphics:
  lines w0.254: 39.899,-30.779 39.899,31.44 cw(c42.439,31.44) 42.439,33.98 149.119,33.98 cw(c149.119,31.44) 151.659,31.44 151.659,-30.903 ; 39.899,-30.704 ccw(c42.464,-30.704) 42.419,-33.269 ; 42.439,-33.269 149.119,-33.269 ccw(c149.119,-30.729) 151.659,-30.729
  lines w0.635: 41.134,-30.779 41.169,6.04 cw(c42.439,6.04) 42.439,7.31 84.984,7.31 cw(c84.984,6.04) 86.254,6.04 86.253,-30.716 ; 41.169,-30.729 ccw(c42.439,-30.729) 42.417,-31.999 ; 42.417,8.58 cw(c42.439,9.85) 41.169,9.85 41.169,15.565 cw(c42.439,15.565) 42.439,16.835 61.489,16.835 ; 42.439,-31.999 84.984,-31.999 ; 42.439,8.58 61.489,8.58 ; 61.471,16.834 cw(c61.514,15.591) 62.759,15.591 ; 61.489,18.105 42.439,18.105 cw(c42.439,19.375) 41.169,19.375 41.169,25.09 cw(c42.439,25.09) 42.439,26.36 61.489,26.36 ; 61.514,8.58 ccw(c61.514,9.825) 62.759,9.825 ; 61.514,26.36 cw(c61.514,25.116) 62.759,25.116 ; 61.54,18.105 ccw(c61.54,19.324) 62.759,19.324 ; 62.759,9.85 62.759,15.565 ; 62.759,19.375 62.759,25.09 ; 64.029,9.825 ccw(c65.273,9.825) 65.273,8.58 ; 64.029,9.85 64.029,13.025 cw(c65.299,13.025) 65.299,14.295 105.939,14.295 ; 64.029,16.81 ccw(c65.273,16.81) 65.273,15.565 ; 64.029,16.835 64.029,25.09 cw(c65.299,25.09) 65.299,26.36 105.939,26.36 cw(c105.939,25.09) 107.209,25.09 107.209,16.835 ; 65.299,8.58 105.939,8.58 ; 65.299,15.565 105.961,15.565 ccw(c105.939,16.835) 107.209,16.835 ; 85.013,-31.999 ccw(c85.035,-30.78) 86.253,-30.737 ; 87.524,-30.903 87.524,6.04 cw(c88.794,6.04) 88.794,7.31 131.339,7.31 cw(c131.339,6.04) 132.609,6.04 132.608,-30.903 ; 87.524,-30.729 ccw(c88.794,-30.729) 88.772,-31.999 ; 88.794,-31.999 131.339,-31.999 ; 105.964,8.58 ccw(c105.964,9.825) 107.209,9.846 ; 105.964,14.295 cw(c105.964,13.051) 107.209,13.051 ; 107.209,9.85 107.209,13.025 ; 108.479,9.85 108.479,13.025 ; 108.479,9.876 ccw(c109.774,9.876) 109.752,8.58 ; 108.48,13.012 cw(c109.698,13.076) 109.698,14.295 ; 109.749,8.58 117.369,8.58 ccw(c117.369,9.85) 118.639,9.85 118.639,13.025 ; 109.749,14.295 117.369,14.295 ; 117.394,14.295 cw(c117.394,13.051) 118.639,13.051 ; 119.909,9.825 ccw(c121.153,9.825) 121.175,8.58 ; 119.909,9.85 119.909,13.025 cw(c121.179,13.025) 121.179,14.295 149.119,14.295 ; 121.179,8.58 149.119,8.58 ccw(c149.119,9.85) 150.389,9.85 150.389,13.051 ccw(c149.144,13.051) 149.144,14.295 ; 131.368,-31.999 ccw(c131.39,-30.78) 132.608,-30.737 ; 133.879,-30.966 133.879,6.04 cw(c135.149,6.04) 135.149,7.31 149.119,7.31 ; 133.879,-30.754 ccw(c135.123,-30.754) 135.145,-31.999 ; 135.149,-31.999 149.119,-31.999 ccw(c149.119,-30.729) 150.389,-30.729 ; 149.101,32.709 cw(c149.144,31.466) 150.389,31.466 ; 149.119,7.31 cw(c149.119,6.04) 150.389,6.062 ; 149.119,32.71 109.749,32.71 ccw(c109.749,31.44) 108.479,31.44 108.479,16.835 ccw(c109.749,16.835) 109.749,15.565 149.119,15.565 ccw(c149.119,16.835) 150.389,16.835 150.389,31.44 ; 150.389,-31.028 150.389,6.04 ; 41.169,28.9 ccw(c42.439,28.9) 42.439,27.63 105.939,27.63 ccw(c105.939,28.9) 107.209,28.9 107.209,31.44 ccw(c105.939,31.44) 105.939,32.71 42.439,32.71 ccw(c42.439,31.44) 41.169,31.44 41.169,28.9
  text "ZPOWER, LLC" at 110.232,29.229 h2.16
  text "PROJECT: ZPW 204" at 44.344,28.9 h2.29
  text "TITLE:" at 64.981,24.138 h1.14
  text "ENGINEER: J. PEREZ" at 42.439,23.82 h1.14
  text "4765 CALLE QUETZAL / CAMARILLO, CA 93012" at 110.077,23.701 h1.27
  text "WWW.ZPOWERBATTERY.COM" at 110.077,21.176 h1.27
  text "PWB, 4 LAYER FLEX" at 65.834,21.121 h2.29
  text "PHONE: 805-889-4531" at 42.439,19.375 h1.14
  text "866-364-2909" at 110.284,18.645 h1.27
  text "DESIGNER: J. PEREZ" at 42.932,14.446 h1.14
  text "CONFIDENTIAL" at -23.903,13.997 h5
  text "PART NO.:" at 65.299,12.073 h1.14
  text "REV:" at 109.431,12.073 h1.14
  text "DATE:" at 121.179,12.073 h1.14
  text ".PRINT_DATE" at 126.894,10.168 h2.29
  text "PHONE: 805-889-4531" at 42.932,10.001 h1.14
  text "9-10-00203-3_REV02_062018" at 71.342,9.805 h1.5
  text "02" at 112.155,9.37 h2.29
  text "FILE NAME:" at 42.439,5.024 h1.14
  text "LAYER:" at 89.175,5.024 h1.14
  text "GERBER:" at 135.403,5.024 h1.14
  text ".PCB_FILE_NAME_NO_PATH" at 42.439,1.621 h2.29
  text ".LAYER_NAME" at 42.439,-2.824 h2.29
Drill Drawing:
  lines w0.254: -16.586,71.016 2.845,71.016 ; -15.059,132.292 3.864,132.292 ; -13.357,74.068 -12.595,71.655 ; -12.625,101.431 -12.582,71.915 ; -12.595,71.528 -11.96,74.068 ; -12.519,129.879 -11.884,132.419 -11.884,105.775 ; -11.884,132.292 -11.122,129.879 ; -17.84,45.022 -16.147,45.022 -16.147,46.715 -17.84,46.715 -17.84,45.022 ; -17.84,50.525 -16.147,50.525 -16.993,48.832 -17.84,50.525
  lines w0.381: -19.359,43.879 150.318,43.879 ; -19.359,51.499 150.318,51.499 ; -5.366,40.069 -5.366,55.309 ; 8.346,40.069 8.346,55.309 ; 34.754,40.069 34.754,55.309 ; 47.604,40.069 47.604,55.309 ; 66.242,40.069 66.242,55.309 ; 115.249,40.069 115.249,55.309 ; 130.231,40.069 130.231,55.309 ; -19.359,40.069 150.318,40.069 150.318,55.309 -19.359,55.309 -19.359,40.069
  lines w0.635: 11.634,96.865 60.402,96.865 ; 11.634,96.865 11.634,98.389 60.402,98.389 60.402,96.865 ; 64.682,72.708 6.262,72.708 6.262,75.883 64.682,75.883 ; 64.844,72.708 64.844,75.883 ; 5.642,129.117 5.642,132.292 64.062,132.292 64.062,129.117 5.642,129.117 ; 5.743,85.472 64.163,85.472 64.163,87.117 5.743,87.117 5.743,85.472 ; 5.904,119.114 64.324,119.114 64.324,120.759 5.904,120.759 5.904,119.114 ; 6.066,90.971 6.066,92.617 64.486,92.617 64.486,90.971 6.066,90.971 ; 6.066,113.777 6.066,115.422 64.486,115.422 64.486,113.777 6.066,113.777 ; 6.713,101.646 6.713,103.291 65.133,103.291 65.133,101.646 6.713,101.646 ; 6.912,135.34 6.912,136.61 62.792,136.61 62.792,135.34 6.912,135.34 ; 7.569,67.196 63.449,67.196 63.449,68.466 7.569,68.466 7.569,67.196 ; 10.825,107.54 59.593,107.54 59.593,109.064 10.825,109.064 10.825,107.54 ; 11.957,124.303 60.725,124.303 60.725,125.827 11.957,125.827 11.957,124.303 ; 12.51,79.955 61.278,79.955 61.278,81.479 12.51,81.479 12.51,79.955
  lines w2.54: -30.774,-44.6 -30.774,222.1 172.426,222.1 172.426,-44.6 -30.774,-44.6
  text "NOTES:" at -23.524,212.61 h1.78
  text "1. FABRICATE AND INSPECT PER IPC6011 AND IPC-6013, CLASS 3, TYPE 3." at -23.27,207.784 h1.78
  text "2. MINIMUM TRACE WIDTH IS 4 MIL, MINIMUM CONDUCTOR SPACING IS 4 MIL, MINIMUM PLATED HOLE DIAMETER IS 3.3 MIL." at -23.27,202.704 h1.78
  text "3. LAYER TO LAYER REGISTRATION SHALL BE WITHIN 2 MIL." at -23.27,197.624 h1.78
  text "4. SOLDER MASK TO LAYER REGISTRATION SHALL BE WITHIN 2 MIL." at -23.27,192.544 h1.78
  text "5. HOLE SIZE TOLERANCE, +2/-3 MILS. HOLE POSITION TOLERANCE SHALL BE WITHIN 2 MILS." at -23.27,187.464 h1.78
  text "6. COPPER PLATE ON WALLS OF PLATED HOLES SHALL BE A MINIMUM OF 0.8 MIL." at -23.524,182.13 h1.78
  text "7. LPI SOLDER MASK TOP AND BOTTOM SIDE OVER BASE COPPER (COLOR GREEN)." at -23.524,177.05 h1.78
  text "8. GOLD PLATE EXPOSED COPPER, ELECTROLESS NICKEL (120-360 MICRO-INCH), IMMERSION GOLD (2-6 MICRO-INCH)." at -23.524,171.97 h1.78
  text "9. MATERIALS AND PROCESSES MAY BE CHANGED WITH PRIOR Z-POWER APPROVAL." at -23.524,166.89 h1.78
  text "10. OUTLINE ROUTE TOLERANCE SHALL BE +/- 3MILS." at -23.524,161.81 h1.78
  text "LAYER STACK-UP" at 17.469,141.74 h5.08
  text "TOP SOLDERPASTE (*.GTP)" at 68.44,134.572 h1.91
  text "TOP SOLDER MASK, LPI (*.GTS)" at 68.313,129.619 h1.91
  text "TOP LAYER, 1 OZ. FINISHED CU (CU+PLATING) (*.GTL)" at 68.177,124.358 h1.91
  text "POLYIMIDE" at 68.477,119.138 h1.91
  text "ADHESIVE" at 68.21,113.791 h1.91
  text "LAYER 2, 1/2 OZ. CU (*.G1)" at 68.343,108.177 h1.91
  text "9.18mil+/-1.5mil" at -26.344,102.823 h1.91
  text "POLYIMIDE ONLY" at 68.343,101.761 h1.91
  text "LAYER 3, 1/2 OZ. CU (*.G2)" at 68.21,96.681 h1.91
  text "ADHESIVE" at 68.061,91.131 h1.91
  text "POLYIMIDE" at 67.9,84.823 h1.91
  text "BOTTOM LAYER,  1 OZ. FINISHED CU (CU+PLATING)  (*.GBL)" at 68.109,79.441 h1.91
  text "BOTTOM SOLDER MASK, LPI (*.GBS)" at 67.979,72.788 h1.91
  text "BOTTOM SOLDERPASTE (*.GBP)" at 68.748,66.765 h1.91
  text "Symbol" at -17.073,52.642 h1.83
  text "Count" at -4.223,52.642 h1.83
  text "Hole Size" at 9.489,52.642 h1.83
  text "Plated" at 35.897,52.642 h1.83
  text "Hole Type" at 48.747,52.642 h1.83
  text "Drill Layer Pair" at 67.385,52.642 h1.83
  text "Via/Pad" at 116.392,52.642 h1.83
  text "Pad Shape" at 131.374,52.642 h1.83
  text "8" at -4.223,48.832 h1.52
  text "0.085mm (3.35mil)" at 9.489,48.832 h1.52
  text "PTH" at 35.897,48.832 h1.52
  text "Round" at 48.747,48.832 h1.52
  text "Layer 3 - Layer 4 (bottom)" at 67.385,48.832 h1.52
  text "Via" at 116.392,48.832 h1.52
  text "Rounded" at 131.374,48.832 h1.52
  text "20" at -4.223,45.022 h1.52
  text "0.085mm (3.35mil)" at 9.489,45.022 h1.52
  text "PTH" at 35.897,45.022 h1.52
  text "Round" at 48.747,45.022 h1.52
  text "Layer 1 (Top) - Layer 4 (bottom)" at 67.385,45.022 h1.52
  text "Via" at 116.392,45.022 h1.52
  text "Rounded" at 131.374,45.022 h1.52
  text "28 Total" at -4.223,41.212 h1.52
  text "Drill Drawing." at 42.413,37.436 h1.52

## Dimensions
0.012,-0.249 to 6.712,-0.248 on Artwork Graphics
0.4,0 to 0.4,3.1 on Artwork Graphics